# EAGLE board nanonode-xmega-mc (EAGLE 5.10)
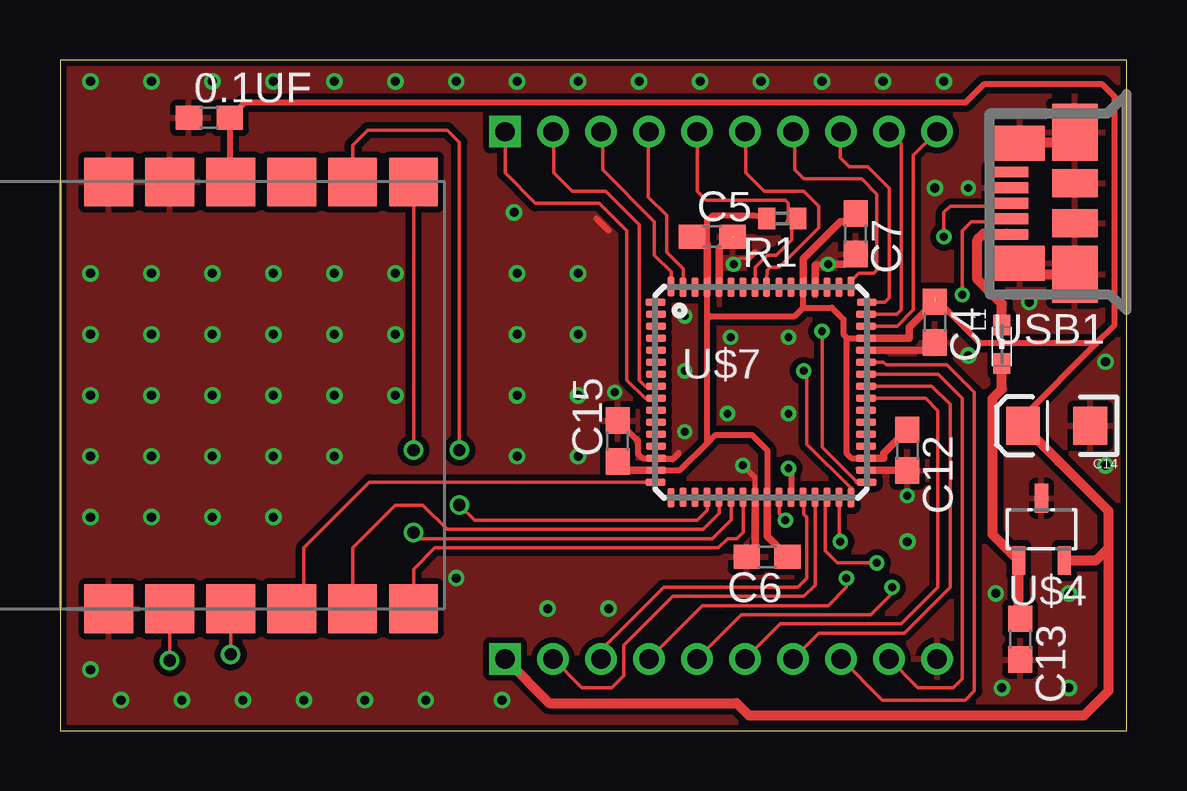
[diagram p0: board, top side]
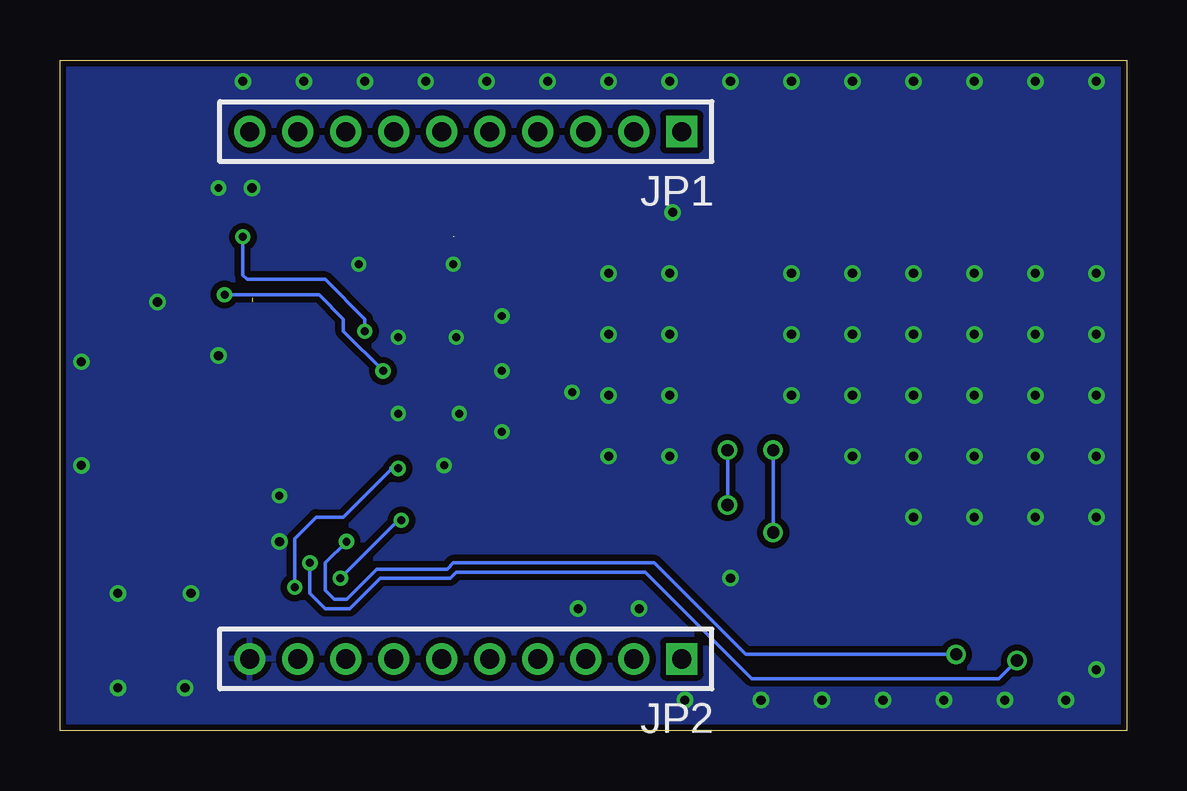
[diagram p1: board, bottom side, seen from below]

Size 44.45 x 27.94 mm. Coordinates in mm from the lower left corner, seen from the top.
Outline: 44.45,27.94 0,27.94 0,0 44.45,0 44.45,27.94
Copper layers (1*16): Top 0.035mm / dielectric 1.5mm / Bottom 0.035mm
Design rules "Fusion_eagle_rule_v1.1": minimum track width 6mil, minimum drill 12mil, track to track 6mil, track to pad 6mil, pad to pad 6mil, via to via 6mil, smd to smd 0mil, copper to edge 10mil, drill to drill 10mil, minimum pad ring 10mil, minimum via ring 6mil, stop-mask expansion 2mil, vias tented up to drill 100mil, thermal gap 10mil

## Footprints (pad centres in the part's own frame; a part is rotated, then mirrored left to right if it is on the bottom)
C0603 = smd 1.1 x 1: 1 -0.85,0; 2 0.85,0
EIA3216 = smd 1.4 x 1.6: A 1.4,0; C -1.4,0
1X10-2MM = drill 0.8 square: 1 0,0 | drill 0.8 round: 2 2,0; 3 4,0; 4 6,0; 5 8,0; 6 10,0; 7 12,0; 8 14,0; 9 16,0; 10 18,0
0603 = smd 0.85 x 0.7: 1 -0.9,0; 2 0.7,0
R0402 = smd 0.7 x 0.9: 1 -0.65,0; 2 0.65,0
SOT23-3 = smd 0.55 x 1.2: 1 0.95,1.3; 2 -0.95,1.3; 3 0,-1.3
MRF24J40MA = smd 2.032 x 2.032: 1 -13.97,0; 2 -11.43,0; 3 -8.89,0; 4 -6.35,0; 5 -3.81,0; 6 -1.27,0; 7 -1.27,17.78; 8 -3.81,17.78; 9 -6.35,17.78; 10 -8.89,17.78; 11 -11.43,17.78; 12 -13.97,17.78
MLF64 = smd 0.827 x 0.3: 1 -4.401,3.75; 2 -4.376,3.25; 3 -4.376,2.75; 4 -4.376,2.25; 5 -4.376,1.75; 6 -4.376,1.25; 7 -4.376,0.75; 8 -4.376,0.25; 9 -4.376,-0.25; 10 -4.376,-0.75; 11 -4.376,-1.25; 12 -4.376,-1.75; 13 -4.376,-2.25; 14 -4.376,-2.75; 15 -4.376,-3.25; 16 -4.401,-3.75; 33 4.401,-3.75; 34 4.376,-3.25; 35 4.376,-2.75; 36 4.376,-2.25; 37 4.376,-1.75; 38 4.376,-1.25; 39 4.376,-0.75; 40 4.376,-0.25; 41 4.376,0.25; 42 4.376,0.75; 43 4.376,1.25; 44 4.376,1.75; 45 4.376,2.25; 46 4.376,2.75; 47 4.376,3.25; 48 4.401,3.75 | smd 0.3 x 0.827: 17 -3.75,-4.401; 18 -3.25,-4.376; 19 -2.75,-4.376; 20 -2.25,-4.376; 21 -1.75,-4.376; 22 -1.25,-4.376; 23 -0.75,-4.376; 24 -0.25,-4.376; 25 0.25,-4.376; 26 0.75,-4.376; 27 1.25,-4.376; 28 1.75,-4.376; 29 2.25,-4.376; 30 2.75,-4.376; 31 3.25,-4.376; 32 3.75,-4.401; 49 3.75,4.401; 50 3.25,4.376; 51 2.75,4.376; 52 2.25,4.376; 53 1.75,4.376; 54 1.25,4.376; 55 0.75,4.376; 56 0.225,4.376; 57 -0.25,4.376; 58 -0.75,4.376; 59 -1.25,4.376; 60 -1.75,4.376; 61 -2.25,4.376; 62 -2.75,4.376; 63 -3.25,4.376; 64 -3.75,4.401
MOLEX-47364-0001 = smd 1.7 x 0.45: 1 2.8,1.3; 2 2.8,0.65; 3 2.8,0; 4 2.8,-0.65; 5 2.8,-1.3 | smd 1.9 x 2.375: GND1 0,2.95; GND4 0,-2.95 | smd 2.1 x 1.475: GND2 2.3,2.5; GND3 2.3,-2.5 | smd 1.9 x 1.175: GND5 0,-0.838; GND6 0,0.838

## Placement (x,y rotation side)
0.1UF  1uF  [C0603]  6.22,25.53 0 top
C4  0.1uF  [C0603]  36.45,17.02 270 top
C5  0.1uF  [C0603]  27.18,20.57 0 top
C6  0.1uF  [C0603]  29.46,7.24 180 top
C7  0.1uF  [C0603]  33.15,20.7 270 top
C12  0.1uF  [C0603]  35.31,11.68 270 top
C13  1uF  [C0603]  40.01,3.81 270 top
C14  10uF  [EIA3216]  41.53,12.7 180 top
C15  0.1uF  [C0603]  23.24,12.06 90 top
JP1  M102MM  [1X10-2MM]  18.54,24.96 180 bottom
JP2  M102MM  [1X10-2MM]  18.54,2.98 180 bottom
L1  220 Ohm  [0603]  39.24,16 270 top
R1  1K  [R0402]  30.1,21.34 180 top
U$4  MCP1700  [SOT23-3]  40.89,8.38 180 top
U$5  MRF24J40MA  [MRF24J40MA]  16,5.08 0 top
U$7  XMEGA-A3MLF  [MLF64]  29.21,14.1 0 top
USB1  MOLEX-47346-0001  [MOLEX-47364-0001]  42.29,21.97 180 top

## Library data of the parts
0.1UF C4-C7 C12 C13 C15 = rcl
C14 JP1 JP2 = sparkfun
L1 = wuerth-elektronik
R1 = resistor
U$4 = nonolith
U$5 U$7 USB1 = custom

## Nets
3.3V: 0.1UF.2 C4.1 C5.1 C6.1 C7.1 C12.1 C14.A C15.1 JP2.1 R1.2 U$4.2 U$5.10 U$7.15 U$7.25 U$7.35 U$7.45 U$7.53 U$7.61
5V: L1.1 USB1.1
ADC0: JP1.3 U$7.64
ADC1: JP1.4 U$7.63
D+: U$7.33 USB1.3
D-: U$7.32 USB1.2
DAC0: JP1.2 U$7.8
DAC1: JP1.1 U$7.9
GND: 0.1UF.1 C4.2 C5.2 C6.2 C7.2 C12.2 C13.2 C14.C C15.2 JP2.10 U$4.3 U$5.1 U$5.11 U$5.12 U$7.14 U$7.24 U$7.34 U$7.44 U$7.52 U$7.60 USB1.4 USB1.GND1 USB1.GND2 USB1.GND3 USB1.GND4 USB1.GND5 USB1.GND6
IRQ: U$5.4 U$7.16
MISO: U$5.7 U$7.22
MISO1: JP2.9 U$7.42
MOSI: U$5.5 U$7.21
MOSI1: JP2.7 U$7.41
N$13: C13.1 L1.2 U$4.1
PDI: JP1.6 U$7.56
PWM0: JP1.10 U$7.46
PWM1: JP1.9 U$7.47
RD_RST: U$5.2 U$7.30
RD_WAKE: U$5.3 U$7.31
RST: JP1.5 R1.1 U$7.57
RX: JP2.3 U$7.28
RX1: JP1.8 U$7.48
SCK: U$5.6 U$7.23
SCK1: JP2.8 U$7.43
SCL: JP2.5 U$7.27
SDA: JP2.4 U$7.26
SS: U$5.8 U$7.20
SS1: JP2.6 U$7.40
TX: JP2.2 U$7.29
TX1: JP1.7 U$7.49

## Tracks (layer width: path | path; a pad name or v marks a point on that pad's centre or on a via)
3.3V  (1 unrouted)
  Top 0.254: C15.1 23.81,10.85 | U$7.15 25.83,10.85 26.96,11.97 | U$7.25 29.46,9.78 29.46,11.68 28.83,12.32 27.3,12.32 26.96,11.97 | 26.96,11.97 26.96,17.14 | 26.96,17.14 U$7.61 | 30.96,17.62 U$7.53 | 30.96,17.62 30.61,17.27 27.09,17.27 26.96,17.14 | 30.96,17.62 32.16,17.62 32.64,17.14 32.64,16.51 32.8,16.35 | 32.8,16.35 U$7.45 | C5.1 26.96,20.27 26.96,21.25 27.18,21.46 28.94,21.46 R1.2 | U$7.35 32.98,11.35 32.77,11.56 32.77,16.31 32.8,16.35 | C14.A 40.13,13.08 43.18,16.13 | 43.18,16.13 43.94,16.89 43.94,26.42 43.43,26.92 38.48,26.92 37.72,26.16 7.71,26.16 0.1UF.2 7.07,22.9 U$5.10 | 43.18,16.13 38.35,16.13 36.45,18.03
  Top 0.305: 23.81,10.85 U$7.15 | U$7.35 34.32,11.35 34.32,11.55 C12.1 | U$7.45 35.38,16.35 35.38,16.8 C4.1 | U$7.61 26.96,20.27 | U$7.25 29.46,8.09 C6.1 | U$7.53 30.96,19.66 32.51,21.21 32.8,21.21 C7.1
  Top 0.406: JP2.1 20.38,1.14 28.19,1.14 28.7,0.64 42.67,0.64 43.69,1.65 43.69,7.62 | C14.A 41.61,11.22 41.62,11.22 43.69,9.14 43.69,7.62 | U$4.2 43.15,7.08 43.69,7.62
5V
  Top 0.406: L1.1 39.24,17.78 38.23,18.8 38.23,20.45 38.48,20.7 39.46,20.7 USB1.1
ADC0
  Top 0.152: JP1.3 22.61,24.89 22.61,23.37 24.77,21.21 24.77,19.81 25.46,19.12 U$7.64
ADC1
  Top 0.152: JP1.4 24.51,24.92 24.51,22.23 25.27,21.46 25.27,19.94 25.96,19.25 U$7.63
D+  (via drill 0.33)
  Top 0.152: v36.83,20.57 36.83,21.59 37.08,21.84 39.36,21.84 USB1.3 | 33.21,10.35 31.75,11.81 v31.75,16.64
  Top 0.203: U$7.33 33.21,10.35
  Bottom 0.152: v31.75,16.64 31.75,17.14 33.4,18.8 36.65,18.8 36.83,18.97 v36.83,20.57
D-  (via drill 0.33)
  Top 0.152: 32.96,10.09 31.11,11.94 31.11,14.86 v30.99,14.99 | v37.59,18.16 37.59,20.83 37.97,21.21 39.38,21.21 USB1.2
  Top 0.203: U$7.32 32.96,10.09
  Bottom 0.152: v37.59,18.16 33.66,18.16 32.64,17.14 32.64,16.64 v30.99,14.99
DAC0
  Top 0.152: U$7.8 24.39,14.35 24.13,14.61 24.13,21.08 22.73,22.48 21.34,22.48 20.57,23.24 20.57,24.92 JP1.2
DAC1
  Top 0.152: JP1.1 18.54,23.24 19.81,21.97 22.48,21.97 23.62,20.83 23.62,14.61 24.38,13.85 U$7.9
GND  (via drill 0.33, 0.38)  (1 unrouted)
  Top 0.152: 28.7,19.68 28.32,19.68 v28.07,19.43
  Top 0.203: U$7.24 28.96,10.54 v28.45,11.05
  Top 0.254: C6.2 28.96,7.64 | 35.12,10.85 C12.2 | 24.61,11.35 U$7.14 24.26,11.35 24.08,11.53 24.08,12.08 C15.2 | 36.18,15.85 C4.2 | 32.65,19.43 C7.2 | 27.94,20.57 28.07,20.57 | 22.35,21.34 22.86,20.83 | 28.7,19.68 28.96,19.94 | 31.46,19.39 31.5,19.43 v32,19.43 | 24.89,11.3 25.53,11.3 25.78,11.56
  Top 0.305: 28.96,7.64 U$7.24 | U$7.34 35.12,10.85 | U$7.44 36.18,15.85 | v32,19.43 32.65,19.43 | U$7.60 27.46,20.09 27.94,20.57 | U$7.52 31.46,19.39
  Top 0.406: USB1.GND1 40.44,19.02 USB1.GND2 | 40.01,24.51 42.29,24.51
  other vias: 27.94,16.38 35.31,9.78 37.85,15.62 26.04,12.45 43.56,11.05 35.31,7.87 27.81,13.21 30.35,13.21 30.35,16.38 26.04,14.99 26.04,17.27 23.11,14.1 42.04,5.71 36.45,22.61 36.83,27.05 34.29,27.05 31.75,27.05 29.21,27.05 26.67,27.05 24.13,27.05 21.59,27.05 19.05,27.05 16.51,27.05 18.92,21.59 18.41,1.27 38.99,5.71 39.24,1.78 42.04,1.78 37.85,22.61 43.56,15.37 40.39,17.86 1.27,27.05 3.81,27.05 6.35,27.05 8.89,27.05 11.43,27.05 13.97,27.05 1.27,19.05 3.81,19.05 6.35,19.05 8.89,19.05 11.43,19.05 13.97,19.05 13.97,16.51 11.43,16.51 8.89,16.51 6.35,16.51 3.81,16.51 1.27,16.51 1.27,13.97 3.81,13.97 6.35,13.97 8.89,13.97 11.43,13.97 13.97,13.97 11.43,11.43 8.89,11.43 6.35,11.43 3.81,11.43 1.27,11.43 1.27,8.89 3.81,8.89 6.35,8.89 8.89,8.89 19.05,19.05 21.59,19.05 19.05,16.51 21.59,16.51 19.05,13.97 21.59,13.97 19.05,11.43 21.59,11.43 1.27,2.54 2.54,1.27 5.08,1.27 7.62,1.27 10.16,1.27 12.7,1.27 15.24,1.27 16.51,6.35 20.32,5.08 22.86,5.08
  pour Top (isolate 0.254): 44.45,27.94 0,27.94 0,0 44.45,0
  pour Bottom (isolate 0.254): 44.45,27.94 0,27.94 0,0 44.45,0
IRQ
  Top 0.152: U$7.16 12.89,10.35 10.16,7.62 10.16,5.59 U$5.4
MISO  (via drill 0.51)
  Top 0.152: v14.73,11.68 U$5.7 | v14.73,8.26 14.99,8 27.18,8 27.96,8.78 U$7.22
  Bottom 0.152: v14.73,8.26 v14.73,11.68
MISO1
  Top 0.152: U$7.42 36.59,14.85 37.59,13.84 37.59,2.16 37.21,1.78 35.75,1.78 JP2.9
MOSI
  Top 0.152: U$7.21 27.46,9.04 26.8,8.38 16.13,8.38 15.11,9.4 13.97,9.4 12.19,7.62 U$5.5
MOSI1
  Top 0.152: U$7.41 36.33,14.35 37.08,13.59 37.08,5.97 35.18,4.06 31.62,4.06 JP2.7
N$13
  Top 0.406: L1.2 39.24,14.22 38.86,13.84 38.86,8.16 U$4.1 39.94,4.72 C13.1
PDI
  Top 0.152: U$7.56 29.46,19.17 29.59,19.3 29.97,19.3 31.62,20.95 31.62,21.84 30.99,22.48 29.34,22.48 28.57,23.24 28.57,24.92 JP1.6
PWM0
  Top 0.152: JP1.10 35.56,23.97 35.56,17.53 34.88,16.85 U$7.46
PWM1
  Top 0.152: U$7.47 34.87,17.35 35.05,17.53 35.05,24.45 JP1.9
RD_RST  (via drill 0.33, 0.51)
  Top 0.152: U$7.30 31.88,9.64 31.88,7.49 32.38,6.99 v34.04,6.99 | v4.57,2.92 U$5.2
  Bottom 0.152: v34.04,6.99 34.04,5.71 33.4,5.08 32.38,5.08 31.11,6.35 28.19,6.35 27.94,6.6 20.07,6.6 15.62,2.16 5.33,2.16 v4.57,2.92
RD_WAKE  (via drill 0.33, 0.51)
  Top 0.152: 32.46,7.93 U$7.31 | v7.11,3.17 U$5.3
  Top 0.254: v32.51,7.87 32.46,7.93
  Bottom 0.152: v32.51,7.87 33.4,6.99 33.4,5.84 33.02,5.46 32.51,5.46 31.24,6.73 28.32,6.73 28.07,6.99 19.68,6.99 15.88,3.17 v7.11,3.17
RST
  Top 0.152: U$7.57 28.96,19.31 29.46,19.81 29.84,19.81 30.48,20.45 30.48,21.22 | JP1.5 26.54,22.48 26.92,22.1 30.23,22.1 30.35,21.97 30.35,21.22
  Top 0.254: 30.48,21.22 R1.1 30.35,21.22 | JP1.5
RX
  Top 0.152: JP2.3 22.61,3.05 22.61,3.43 25.15,5.97 30.73,5.97 31.11,6.35 31.11,8.89 30.99,9.02 30.99,9.69 U$7.28
RX1
  Top 0.152: U$7.48 34.36,17.85 34.54,18.03 34.54,22.61 33.66,23.5 32.89,23.5 32.51,23.88 32.51,24.93 JP1.8
SCK
  Top 0.152: 28.45,9.76 U$7.23 28.46,8.27 28.19,8 27.81,8 27.43,7.62 15.62,7.62 14.73,6.73 U$5.6
SCK1
  Top 0.152: JP2.8 34.26,1.27 37.72,1.27 38.1,1.65 38.1,14.1 36.96,15.24 34.42,15.24 34.31,15.35 U$7.43
SCL  (via drill 0.33)
  Top 0.152: v34.67,5.97 34.67,5.71 33.78,4.83 28.38,4.83 JP2.5
  Top 0.254: U$7.27 30.46,10.81 v30.35,10.92
  Bottom 0.152: 30.61,10.92 32.64,8.89 33.78,8.89 34.67,8 v34.67,5.97
  Bottom 0.254: 30.61,10.92 v30.35,10.92
SDA  (via drill 0.33)
  Top 0.152: U$7.26 29.96,9.03 v30.23,8.76 | v32.77,6.35 32.77,5.97 32,5.21 26.76,5.21 JP2.4
  Top 0.254: JP2.4 24.54,3.08
  Bottom 0.152: v32.77,6.35 30.35,8.76
  Bottom 0.254: 30.35,8.76 v30.23,8.76
SS  (via drill 0.51)
  Top 0.152: U$7.20 26.96,9.18 26.54,8.76 17.27,8.76 v16.64,9.4 | v16.64,11.68 16.64,24.51 16.13,25.02 12.83,25.02 12.19,24.38 U$5.8
  Bottom 0.152: v16.64,9.4 v16.64,11.68
SS1
  Top 0.152: U$7.40 36.06,13.85 36.58,13.34 36.58,5.97 35.05,4.45 30,4.45 JP2.6
TX
  Top 0.152: JP2.2 21.75,1.78 22.99,1.78 23.5,2.29 23.5,3.56 25.53,5.59 30.99,5.59 31.46,6.06 U$7.29
TX1
  Top 0.152: U$7.49 32.96,18.74 33.27,19.05 33.91,19.05 34.04,19.18 34.04,22.35 33.4,22.99 30.99,22.99 30.61,23.37 30.61,24.89 JP1.7